# EAGLE board gameboyzero (EAGLE 8.4.1)

Size 465.45 x 709 mm. Coordinates in mm from the lower left corner, seen from the top.
Outline: 2236 segments
Copper layers (1*16): Top 0.035mm / dielectric 1.5mm / Bottom 0.035mm
Design rules "default": minimum track width 6mil, minimum drill 0.35mm, track to track 6mil, track to pad 6mil, pad to pad 6mil, via to via 6mil, smd to smd 6mil, copper to edge 40mil, drill to drill 6mil, minimum pad ring 10mil, minimum via ring 8mil, stop-mask expansion 4mil, vias tented up to drill 0mil, thermal gap 10mil

## Footprints (pad centres in the part's own frame; a part is rotated, then mirrored left to right if it is on the bottom)
2,8 = hole 2.8: 0,0

## Placement (x,y rotation side)
H1  MOUNT-HOLE2.8  [2,8]  38.45,545 0 top
H2  MOUNT-HOLE2.8  [2,8]  101.45,545 0 top
H3  MOUNT-HOLE2.8  [2,8]  101.45,575 0 top
H4  MOUNT-HOLE2.8  [2,8]  38.45,632 0 top
H5  MOUNT-HOLE2.8  [2,8]  101.45,632 0 top
H6  MOUNT-HOLE2.8  [2,8]  38.45,639 0 top
H7  MOUNT-HOLE2.8  [2,8]  101.45,639 0 top
H8  MOUNT-HOLE2.8  [2,8]  101.45,669 0 top
H9  MOUNT-HOLE2.8  [2,8]  38.45,676 0 top
H10  MOUNT-HOLE2.8  [2,8]  101.45,676 0 top
H11  MOUNT-HOLE2.8  [2,8]  38.45,451 0 top
H12  MOUNT-HOLE2.8  [2,8]  101.45,451 0 top
H13  MOUNT-HOLE2.8  [2,8]  101.45,481 0 top
H14  MOUNT-HOLE2.8  [2,8]  38.45,538 0 top
H15  MOUNT-HOLE2.8  [2,8]  101.45,538 0 top
H16  MOUNT-HOLE2.8  [2,8]  110.45,313 0 top
H17  MOUNT-HOLE2.8  [2,8]  173.45,313 0 top
H18  MOUNT-HOLE2.8  [2,8]  101.45,682 180 top
H19  MOUNT-HOLE2.8  [2,8]  38.45,682 180 top
H20  MOUNT-HOLE2.8  [2,8]  38.45,688 0 top
H21  MOUNT-HOLE2.8  [2,8]  101.45,688 0 top
H22  MOUNT-HOLE2.8  [2,8]  38.45,313 0 top
H23  MOUNT-HOLE2.8  [2,8]  101.45,313 0 top
H24  MOUNT-HOLE2.8  [2,8]  101.45,343 0 top
H25  MOUNT-HOLE2.8  [2,8]  38.45,400 0 top
H26  MOUNT-HOLE2.8  [2,8]  101.45,400 0 top
H27  MOUNT-HOLE2.8  [2,8]  101.45,694 180 top
H28  MOUNT-HOLE2.8  [2,8]  38.45,694 180 top
H29  MOUNT-HOLE2.8  [2,8]  38.45,700 0 top
H30  MOUNT-HOLE2.8  [2,8]  101.45,700 0 top
H31  MOUNT-HOLE2.8  [2,8]  101.45,706 180 top
H32  MOUNT-HOLE2.8  [2,8]  38.45,407 0 top
H33  MOUNT-HOLE2.8  [2,8]  101.45,407 0 top
H34  MOUNT-HOLE2.8  [2,8]  101.45,437 0 top
H35  MOUNT-HOLE2.8  [2,8]  38.45,444 0 top
H36  MOUNT-HOLE2.8  [2,8]  101.45,444 0 top
H37  MOUNT-HOLE2.8  [2,8]  38.45,219 0 top
H38  MOUNT-HOLE2.8  [2,8]  101.45,219 0 top
H39  MOUNT-HOLE2.8  [2,8]  101.45,249 0 top
H40  MOUNT-HOLE2.8  [2,8]  38.45,306 0 top
H41  MOUNT-HOLE2.8  [2,8]  101.45,306 0 top
H42  MOUNT-HOLE2.8  [2,8]  101.45,61 0 top
H43  MOUNT-HOLE2.8  [2,8]  38.45,118 0 top
H44  MOUNT-HOLE2.8  [2,8]  101.45,118 0 top
H45  MOUNT-HOLE2.8  [2,8]  38.45,62 180 top
H46  MOUNT-HOLE2.8  [2,8]  101.45,5 180 top
H47  MOUNT-HOLE2.8  [2,8]  38.45,5 180 top
H48  MOUNT-HOLE2.8  [2,8]  38.45,125 0 top
H49  MOUNT-HOLE2.8  [2,8]  101.45,125 0 top
H50  MOUNT-HOLE2.8  [2,8]  101.45,155 0 top
H51  MOUNT-HOLE2.8  [2,8]  38.45,212 0 top
H52  MOUNT-HOLE2.8  [2,8]  101.45,212 0 top
H53  MOUNT-HOLE2.8  [2,8]  38.45,706 180 top
H54  MOUNT-HOLE2.8  [2,8]  173.45,343 0 top
H55  MOUNT-HOLE2.8  [2,8]  110.45,400 0 top
H56  MOUNT-HOLE2.8  [2,8]  173.45,400 0 top
H57  MOUNT-HOLE2.8  [2,8]  110.45,407 0 top
H58  MOUNT-HOLE2.8  [2,8]  173.45,407 0 top
H59  MOUNT-HOLE2.8  [2,8]  173.45,437 0 top
H60  MOUNT-HOLE2.8  [2,8]  110.45,444 0 top
H61  MOUNT-HOLE2.8  [2,8]  173.45,444 0 top
H62  MOUNT-HOLE2.8  [2,8]  110.45,219 0 top
H63  MOUNT-HOLE2.8  [2,8]  173.45,219 0 top
H64  MOUNT-HOLE2.8  [2,8]  173.45,249 0 top
H65  MOUNT-HOLE2.8  [2,8]  110.45,306 0 top
H66  MOUNT-HOLE2.8  [2,8]  173.45,306 0 top
H67  MOUNT-HOLE2.8  [2,8]  173.45,61 0 top
H68  MOUNT-HOLE2.8  [2,8]  110.45,118 0 top
H69  MOUNT-HOLE2.8  [2,8]  173.45,118 0 top
H70  MOUNT-HOLE2.8  [2,8]  110.45,62 180 top
H71  MOUNT-HOLE2.8  [2,8]  173.45,5 180 top
H72  MOUNT-HOLE2.8  [2,8]  110.45,5 180 top
H73  MOUNT-HOLE2.8  [2,8]  110.45,125 0 top
H74  MOUNT-HOLE2.8  [2,8]  173.45,125 0 top
H75  MOUNT-HOLE2.8  [2,8]  173.45,155 0 top
H76  MOUNT-HOLE2.8  [2,8]  110.45,212 0 top
H77  MOUNT-HOLE2.8  [2,8]  173.45,212 0 top
H78  MOUNT-HOLE2.8  [2,8]  110.45,545 0 top
H79  MOUNT-HOLE2.8  [2,8]  173.45,545 0 top
H80  MOUNT-HOLE2.8  [2,8]  173.45,575 0 top
H81  MOUNT-HOLE2.8  [2,8]  110.45,632 0 top
H82  MOUNT-HOLE2.8  [2,8]  173.45,632 0 top
H83  MOUNT-HOLE2.8  [2,8]  110.45,639 0 top
H84  MOUNT-HOLE2.8  [2,8]  173.45,639 0 top
H85  MOUNT-HOLE2.8  [2,8]  173.45,669 0 top
H86  MOUNT-HOLE2.8  [2,8]  110.45,676 0 top
H87  MOUNT-HOLE2.8  [2,8]  173.45,676 0 top
H88  MOUNT-HOLE2.8  [2,8]  110.45,451 0 top
H89  MOUNT-HOLE2.8  [2,8]  173.45,451 0 top
H90  MOUNT-HOLE2.8  [2,8]  173.45,481 0 top
H91  MOUNT-HOLE2.8  [2,8]  110.45,538 0 top
H92  MOUNT-HOLE2.8  [2,8]  173.45,538 0 top
H93  MOUNT-HOLE2.8  [2,8]  173.45,682 180 top
H94  MOUNT-HOLE2.8  [2,8]  110.45,682 180 top
H95  MOUNT-HOLE2.8  [2,8]  110.45,688 0 top
H96  MOUNT-HOLE2.8  [2,8]  173.45,688 0 top
H97  MOUNT-HOLE2.8  [2,8]  173.45,694 180 top
H98  MOUNT-HOLE2.8  [2,8]  110.45,694 180 top
H99  MOUNT-HOLE2.8  [2,8]  110.45,700 0 top
H100  MOUNT-HOLE2.8  [2,8]  173.45,700 0 top
H101  MOUNT-HOLE2.8  [2,8]  173.45,706 180 top
H102  MOUNT-HOLE2.8  [2,8]  110.45,706 180 top
H103  MOUNT-HOLE2.8  [2,8]  182.45,313 0 top
H104  MOUNT-HOLE2.8  [2,8]  245.45,313 0 top
H105  MOUNT-HOLE2.8  [2,8]  245.45,343 0 top
H106  MOUNT-HOLE2.8  [2,8]  182.45,400 0 top
H107  MOUNT-HOLE2.8  [2,8]  245.45,400 0 top
H108  MOUNT-HOLE2.8  [2,8]  182.45,407 0 top
H109  MOUNT-HOLE2.8  [2,8]  245.45,407 0 top
H110  MOUNT-HOLE2.8  [2,8]  245.45,437 0 top
H111  MOUNT-HOLE2.8  [2,8]  182.45,444 0 top
H112  MOUNT-HOLE2.8  [2,8]  245.45,444 0 top
H113  MOUNT-HOLE2.8  [2,8]  182.45,219 0 top
H114  MOUNT-HOLE2.8  [2,8]  245.45,219 0 top
H115  MOUNT-HOLE2.8  [2,8]  245.45,249 0 top
H116  MOUNT-HOLE2.8  [2,8]  182.45,306 0 top
H117  MOUNT-HOLE2.8  [2,8]  245.45,306 0 top
H118  MOUNT-HOLE2.8  [2,8]  245.45,61 0 top
H119  MOUNT-HOLE2.8  [2,8]  182.45,118 0 top
H120  MOUNT-HOLE2.8  [2,8]  245.45,118 0 top
H121  MOUNT-HOLE2.8  [2,8]  182.45,62 180 top
H122  MOUNT-HOLE2.8  [2,8]  245.45,5 180 top
H123  MOUNT-HOLE2.8  [2,8]  182.45,5 180 top
H124  MOUNT-HOLE2.8  [2,8]  182.45,125 0 top
H125  MOUNT-HOLE2.8  [2,8]  245.45,125 0 top
H126  MOUNT-HOLE2.8  [2,8]  245.45,155 0 top
H127  MOUNT-HOLE2.8  [2,8]  182.45,212 0 top
H128  MOUNT-HOLE2.8  [2,8]  245.45,212 0 top
H129  MOUNT-HOLE2.8  [2,8]  182.45,545 0 top
H130  MOUNT-HOLE2.8  [2,8]  245.45,545 0 top
H131  MOUNT-HOLE2.8  [2,8]  245.45,575 0 top
H132  MOUNT-HOLE2.8  [2,8]  182.45,632 0 top
H133  MOUNT-HOLE2.8  [2,8]  245.45,632 0 top
H134  MOUNT-HOLE2.8  [2,8]  182.45,639 0 top
H135  MOUNT-HOLE2.8  [2,8]  245.45,639 0 top
H136  MOUNT-HOLE2.8  [2,8]  245.45,669 0 top
H137  MOUNT-HOLE2.8  [2,8]  182.45,676 0 top
H138  MOUNT-HOLE2.8  [2,8]  245.45,676 0 top
H139  MOUNT-HOLE2.8  [2,8]  182.45,451 0 top
H140  MOUNT-HOLE2.8  [2,8]  245.45,451 0 top
H141  MOUNT-HOLE2.8  [2,8]  245.45,481 0 top
H142  MOUNT-HOLE2.8  [2,8]  182.45,538 0 top
H143  MOUNT-HOLE2.8  [2,8]  245.45,538 0 top
H144  MOUNT-HOLE2.8  [2,8]  245.45,682 180 top
H145  MOUNT-HOLE2.8  [2,8]  182.45,682 180 top
H146  MOUNT-HOLE2.8  [2,8]  182.45,688 0 top
H147  MOUNT-HOLE2.8  [2,8]  245.45,688 0 top
H148  MOUNT-HOLE2.8  [2,8]  245.45,694 180 top
H149  MOUNT-HOLE2.8  [2,8]  182.45,694 180 top
H150  MOUNT-HOLE2.8  [2,8]  182.45,700 0 top
H151  MOUNT-HOLE2.8  [2,8]  245.45,700 0 top
H152  MOUNT-HOLE2.8  [2,8]  245.45,706 180 top
H153  MOUNT-HOLE2.8  [2,8]  182.45,706 180 top
H154  MOUNT-HOLE2.8  [2,8]  254.45,313 0 top
H155  MOUNT-HOLE2.8  [2,8]  317.45,313 0 top
H156  MOUNT-HOLE2.8  [2,8]  317.45,343 0 top
H157  MOUNT-HOLE2.8  [2,8]  254.45,400 0 top
H158  MOUNT-HOLE2.8  [2,8]  317.45,400 0 top
H159  MOUNT-HOLE2.8  [2,8]  254.45,407 0 top
H160  MOUNT-HOLE2.8  [2,8]  317.45,407 0 top
H161  MOUNT-HOLE2.8  [2,8]  317.45,437 0 top
H162  MOUNT-HOLE2.8  [2,8]  254.45,444 0 top
H163  MOUNT-HOLE2.8  [2,8]  317.45,444 0 top
H164  MOUNT-HOLE2.8  [2,8]  254.45,219 0 top
H165  MOUNT-HOLE2.8  [2,8]  317.45,219 0 top
H166  MOUNT-HOLE2.8  [2,8]  317.45,249 0 top
H167  MOUNT-HOLE2.8  [2,8]  254.45,306 0 top
H168  MOUNT-HOLE2.8  [2,8]  317.45,306 0 top
H169  MOUNT-HOLE2.8  [2,8]  317.45,61 0 top
H170  MOUNT-HOLE2.8  [2,8]  254.45,118 0 top
H171  MOUNT-HOLE2.8  [2,8]  317.45,118 0 top
H172  MOUNT-HOLE2.8  [2,8]  254.45,62 180 top
H173  MOUNT-HOLE2.8  [2,8]  317.45,5 180 top
H174  MOUNT-HOLE2.8  [2,8]  254.45,5 180 top
H175  MOUNT-HOLE2.8  [2,8]  254.45,125 0 top
H176  MOUNT-HOLE2.8  [2,8]  317.45,125 0 top
H177  MOUNT-HOLE2.8  [2,8]  317.45,155 0 top
H178  MOUNT-HOLE2.8  [2,8]  254.45,212 0 top
H179  MOUNT-HOLE2.8  [2,8]  317.45,212 0 top
H180  MOUNT-HOLE2.8  [2,8]  254.45,545 0 top
H181  MOUNT-HOLE2.8  [2,8]  317.45,545 0 top
H182  MOUNT-HOLE2.8  [2,8]  317.45,575 0 top
H183  MOUNT-HOLE2.8  [2,8]  254.45,632 0 top
H184  MOUNT-HOLE2.8  [2,8]  317.45,632 0 top
H185  MOUNT-HOLE2.8  [2,8]  254.45,639 0 top
H186  MOUNT-HOLE2.8  [2,8]  317.45,639 0 top
H187  MOUNT-HOLE2.8  [2,8]  317.45,669 0 top
H188  MOUNT-HOLE2.8  [2,8]  254.45,676 0 top
H189  MOUNT-HOLE2.8  [2,8]  317.45,676 0 top
H190  MOUNT-HOLE2.8  [2,8]  254.45,451 0 top
H191  MOUNT-HOLE2.8  [2,8]  317.45,451 0 top
H192  MOUNT-HOLE2.8  [2,8]  317.45,481 0 top
H193  MOUNT-HOLE2.8  [2,8]  254.45,538 0 top
H194  MOUNT-HOLE2.8  [2,8]  317.45,538 0 top
H195  MOUNT-HOLE2.8  [2,8]  317.45,682 180 top
H196  MOUNT-HOLE2.8  [2,8]  254.45,682 180 top
H197  MOUNT-HOLE2.8  [2,8]  254.45,688 0 top
H198  MOUNT-HOLE2.8  [2,8]  317.45,688 0 top
H199  MOUNT-HOLE2.8  [2,8]  317.45,694 180 top
H200  MOUNT-HOLE2.8  [2,8]  254.45,694 180 top
H201  MOUNT-HOLE2.8  [2,8]  254.45,700 0 top
H202  MOUNT-HOLE2.8  [2,8]  317.45,700 0 top
H203  MOUNT-HOLE2.8  [2,8]  317.45,706 180 top
H204  MOUNT-HOLE2.8  [2,8]  254.45,706 180 top
H205  MOUNT-HOLE2.8  [2,8]  326.45,313 0 top
H206  MOUNT-HOLE2.8  [2,8]  389.45,313 0 top
H207  MOUNT-HOLE2.8  [2,8]  389.45,343 0 top
H208  MOUNT-HOLE2.8  [2,8]  326.45,400 0 top
H209  MOUNT-HOLE2.8  [2,8]  389.45,400 0 top
H210  MOUNT-HOLE2.8  [2,8]  326.45,407 0 top
H211  MOUNT-HOLE2.8  [2,8]  389.45,407 0 top
H212  MOUNT-HOLE2.8  [2,8]  389.45,437 0 top
H213  MOUNT-HOLE2.8  [2,8]  326.45,444 0 top
H214  MOUNT-HOLE2.8  [2,8]  389.45,444 0 top
H215  MOUNT-HOLE2.8  [2,8]  326.45,219 0 top
H216  MOUNT-HOLE2.8  [2,8]  389.45,219 0 top
H217  MOUNT-HOLE2.8  [2,8]  389.45,249 0 top
H218  MOUNT-HOLE2.8  [2,8]  326.45,306 0 top
H219  MOUNT-HOLE2.8  [2,8]  389.45,306 0 top
H220  MOUNT-HOLE2.8  [2,8]  389.45,61 0 top
H221  MOUNT-HOLE2.8  [2,8]  326.45,118 0 top
H222  MOUNT-HOLE2.8  [2,8]  389.45,118 0 top
H223  MOUNT-HOLE2.8  [2,8]  326.45,62 180 top
H224  MOUNT-HOLE2.8  [2,8]  389.45,5 180 top
H225  MOUNT-HOLE2.8  [2,8]  326.45,5 180 top
H226  MOUNT-HOLE2.8  [2,8]  326.45,125 0 top
H227  MOUNT-HOLE2.8  [2,8]  389.45,125 0 top
H228  MOUNT-HOLE2.8  [2,8]  389.45,155 0 top
H229  MOUNT-HOLE2.8  [2,8]  326.45,212 0 top
H230  MOUNT-HOLE2.8  [2,8]  389.45,212 0 top
H231  MOUNT-HOLE2.8  [2,8]  326.45,545 0 top
H232  MOUNT-HOLE2.8  [2,8]  389.45,545 0 top
H233  MOUNT-HOLE2.8  [2,8]  389.45,575 0 top
H234  MOUNT-HOLE2.8  [2,8]  326.45,632 0 top
H235  MOUNT-HOLE2.8  [2,8]  389.45,632 0 top
H236  MOUNT-HOLE2.8  [2,8]  326.45,639 0 top
H237  MOUNT-HOLE2.8  [2,8]  389.45,639 0 top
H238  MOUNT-HOLE2.8  [2,8]  389.45,669 0 top
H239  MOUNT-HOLE2.8  [2,8]  326.45,676 0 top
H240  MOUNT-HOLE2.8  [2,8]  389.45,676 0 top
H241  MOUNT-HOLE2.8  [2,8]  326.45,451 0 top
H242  MOUNT-HOLE2.8  [2,8]  389.45,451 0 top
H243  MOUNT-HOLE2.8  [2,8]  389.45,481 0 top
H244  MOUNT-HOLE2.8  [2,8]  326.45,538 0 top
H245  MOUNT-HOLE2.8  [2,8]  389.45,538 0 top
H246  MOUNT-HOLE2.8  [2,8]  389.45,682 180 top
H247  MOUNT-HOLE2.8  [2,8]  326.45,682 180 top
H248  MOUNT-HOLE2.8  [2,8]  326.45,688 0 top
H249  MOUNT-HOLE2.8  [2,8]  389.45,688 0 top
H250  MOUNT-HOLE2.8  [2,8]  389.45,694 180 top
H251  MOUNT-HOLE2.8  [2,8]  326.45,694 180 top
H252  MOUNT-HOLE2.8  [2,8]  326.45,700 0 top
H253  MOUNT-HOLE2.8  [2,8]  389.45,700 0 top
H254  MOUNT-HOLE2.8  [2,8]  389.45,706 180 top
H255  MOUNT-HOLE2.8  [2,8]  326.45,706 180 top
H256  MOUNT-HOLE2.8  [2,8]  398.45,313 0 top
H257  MOUNT-HOLE2.8  [2,8]  461.45,313 0 top
H258  MOUNT-HOLE2.8  [2,8]  461.45,343 0 top
H259  MOUNT-HOLE2.8  [2,8]  398.45,400 0 top
H260  MOUNT-HOLE2.8  [2,8]  461.45,400 0 top
H261  MOUNT-HOLE2.8  [2,8]  398.45,407 0 top
H262  MOUNT-HOLE2.8  [2,8]  461.45,407 0 top
H263  MOUNT-HOLE2.8  [2,8]  461.45,437 0 top
H264  MOUNT-HOLE2.8  [2,8]  398.45,444 0 top
H265  MOUNT-HOLE2.8  [2,8]  461.45,444 0 top
H266  MOUNT-HOLE2.8  [2,8]  398.45,219 0 top
H267  MOUNT-HOLE2.8  [2,8]  461.45,219 0 top
H268  MOUNT-HOLE2.8  [2,8]  461.45,249 0 top
H269  MOUNT-HOLE2.8  [2,8]  398.45,306 0 top
H270  MOUNT-HOLE2.8  [2,8]  461.45,306 0 top
H271  MOUNT-HOLE2.8  [2,8]  461.45,61 0 top
H272  MOUNT-HOLE2.8  [2,8]  398.45,118 0 top
H273  MOUNT-HOLE2.8  [2,8]  461.45,118 0 top
H274  MOUNT-HOLE2.8  [2,8]  398.45,62 180 top
H275  MOUNT-HOLE2.8  [2,8]  461.45,5 180 top
H276  MOUNT-HOLE2.8  [2,8]  398.45,5 180 top
H277  MOUNT-HOLE2.8  [2,8]  398.45,125 0 top
H278  MOUNT-HOLE2.8  [2,8]  461.45,125 0 top
H279  MOUNT-HOLE2.8  [2,8]  461.45,155 0 top
H280  MOUNT-HOLE2.8  [2,8]  398.45,212 0 top
H281  MOUNT-HOLE2.8  [2,8]  461.45,212 0 top
H282  MOUNT-HOLE2.8  [2,8]  398.45,545 0 top
H283  MOUNT-HOLE2.8  [2,8]  461.45,545 0 top
H284  MOUNT-HOLE2.8  [2,8]  461.45,575 0 top
H285  MOUNT-HOLE2.8  [2,8]  398.45,632 0 top
H286  MOUNT-HOLE2.8  [2,8]  461.45,632 0 top
H287  MOUNT-HOLE2.8  [2,8]  398.45,639 0 top
H288  MOUNT-HOLE2.8  [2,8]  461.45,639 0 top
H289  MOUNT-HOLE2.8  [2,8]  461.45,669 0 top
H290  MOUNT-HOLE2.8  [2,8]  398.45,676 0 top
H291  MOUNT-HOLE2.8  [2,8]  461.45,676 0 top
H292  MOUNT-HOLE2.8  [2,8]  398.45,451 0 top
H293  MOUNT-HOLE2.8  [2,8]  461.45,451 0 top
H294  MOUNT-HOLE2.8  [2,8]  461.45,481 0 top
H295  MOUNT-HOLE2.8  [2,8]  398.45,538 0 top
H296  MOUNT-HOLE2.8  [2,8]  461.45,538 0 top
H297  MOUNT-HOLE2.8  [2,8]  461.45,682 180 top
H298  MOUNT-HOLE2.8  [2,8]  398.45,682 180 top
H299  MOUNT-HOLE2.8  [2,8]  398.45,688 0 top
H300  MOUNT-HOLE2.8  [2,8]  461.45,688 0 top
H301  MOUNT-HOLE2.8  [2,8]  461.45,694 180 top
H302  MOUNT-HOLE2.8  [2,8]  398.45,694 180 top
H303  MOUNT-HOLE2.8  [2,8]  398.45,700 0 top
H304  MOUNT-HOLE2.8  [2,8]  461.45,700 0 top
H305  MOUNT-HOLE2.8  [2,8]  461.45,706 180 top
H306  MOUNT-HOLE2.8  [2,8]  398.45,706 180 top

## Library data of the parts
H1-H306 = holes

## Text on the board
Dimension: 1" square / reference